# Altium PCB PCB_MAX_QUANG.pcbdoc
Units mil, origin at the board's own origin, x right, y up, seen from the top; angles counter-clockwise.
Board outline 1387.98 x 2391.13 mil, 2 copper layers (Top Layer, Bottom Layer); 20 components, 20 nets, 79 pads, 15 vias.
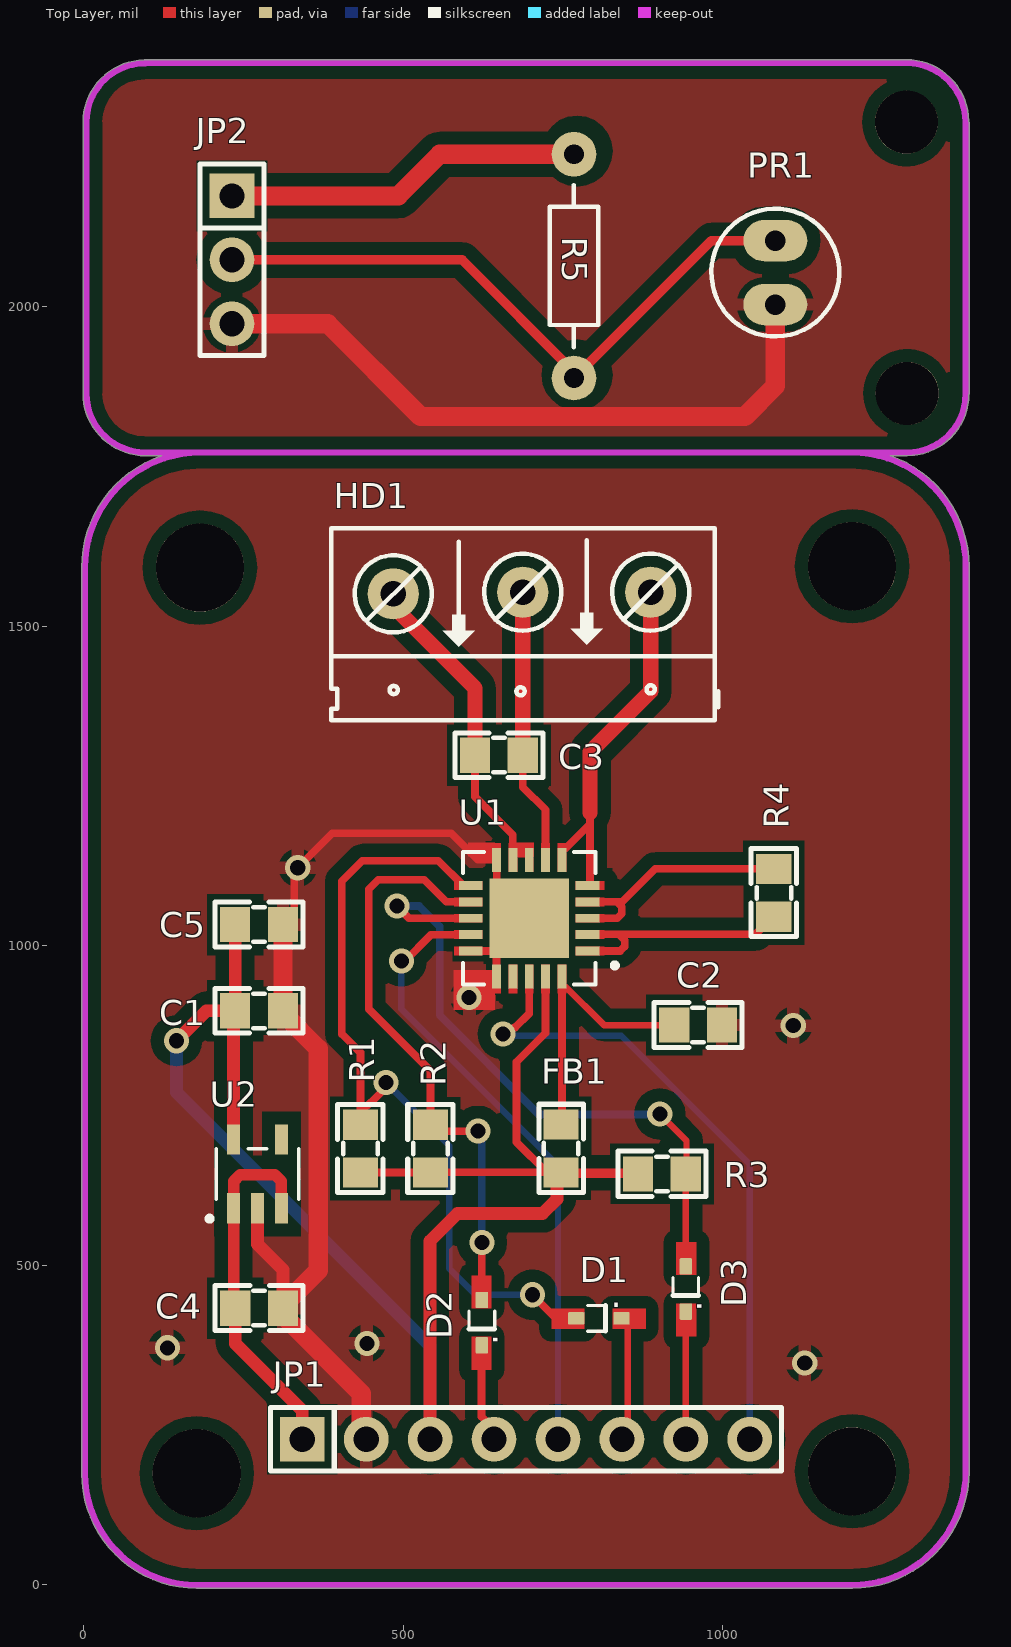
[diagram p0: Top Layer view]
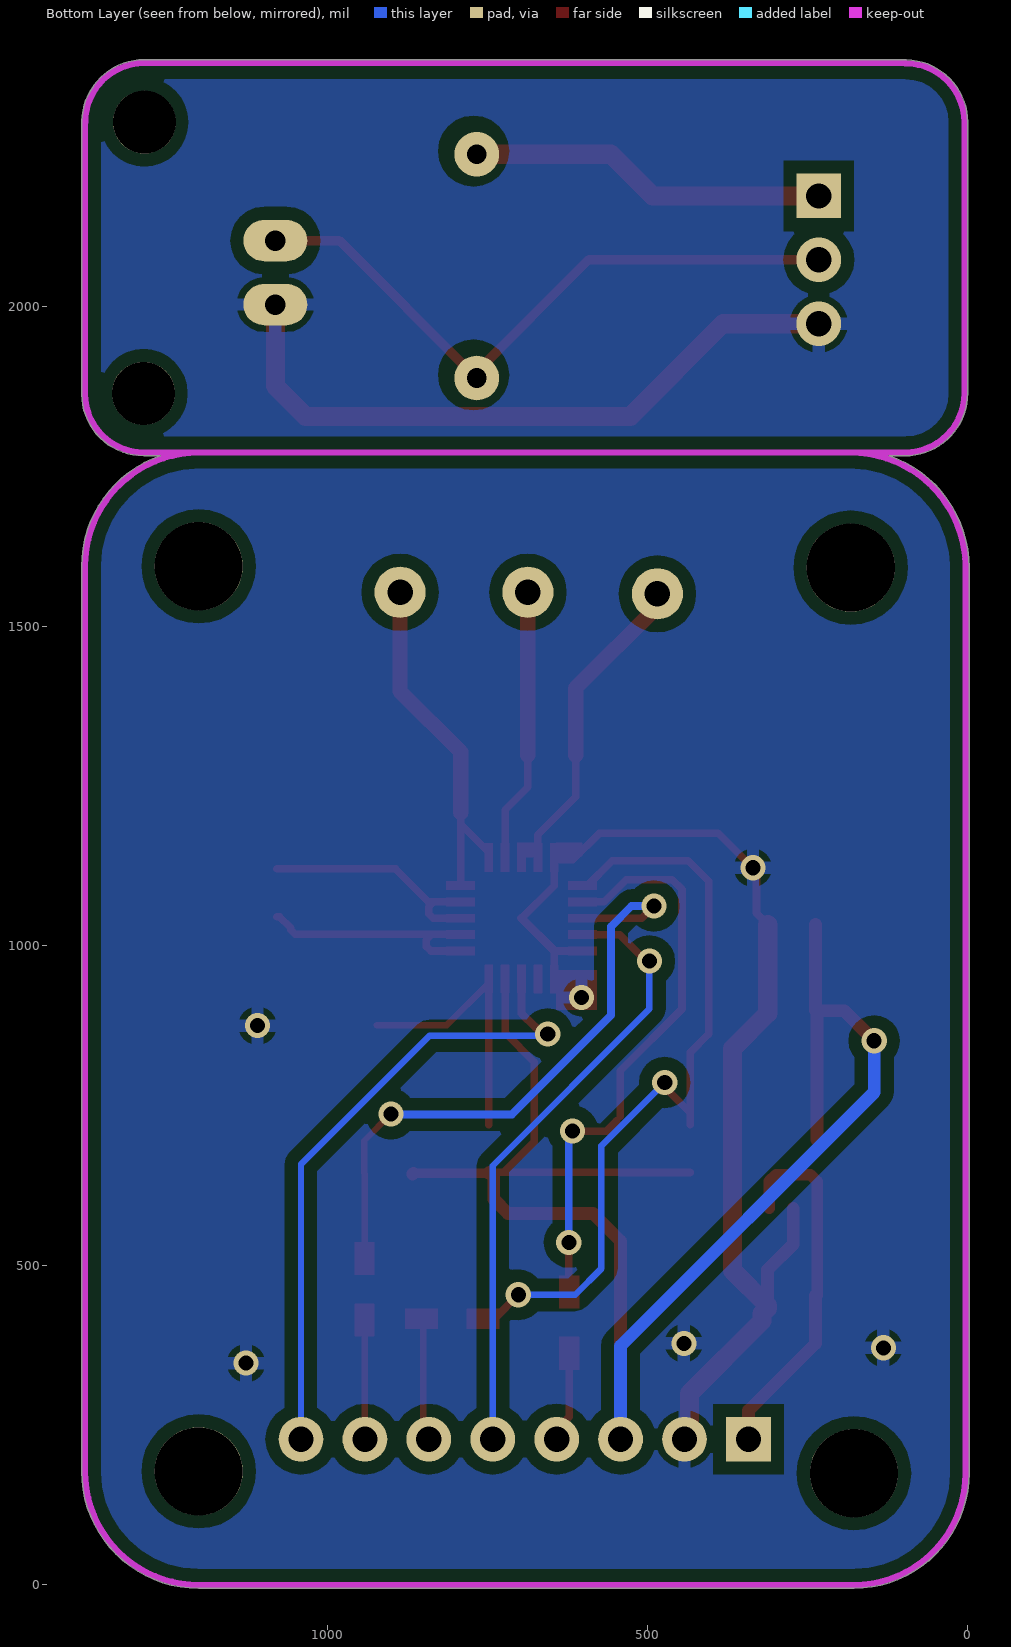
[diagram p1: Bottom Layer view, seen from below]
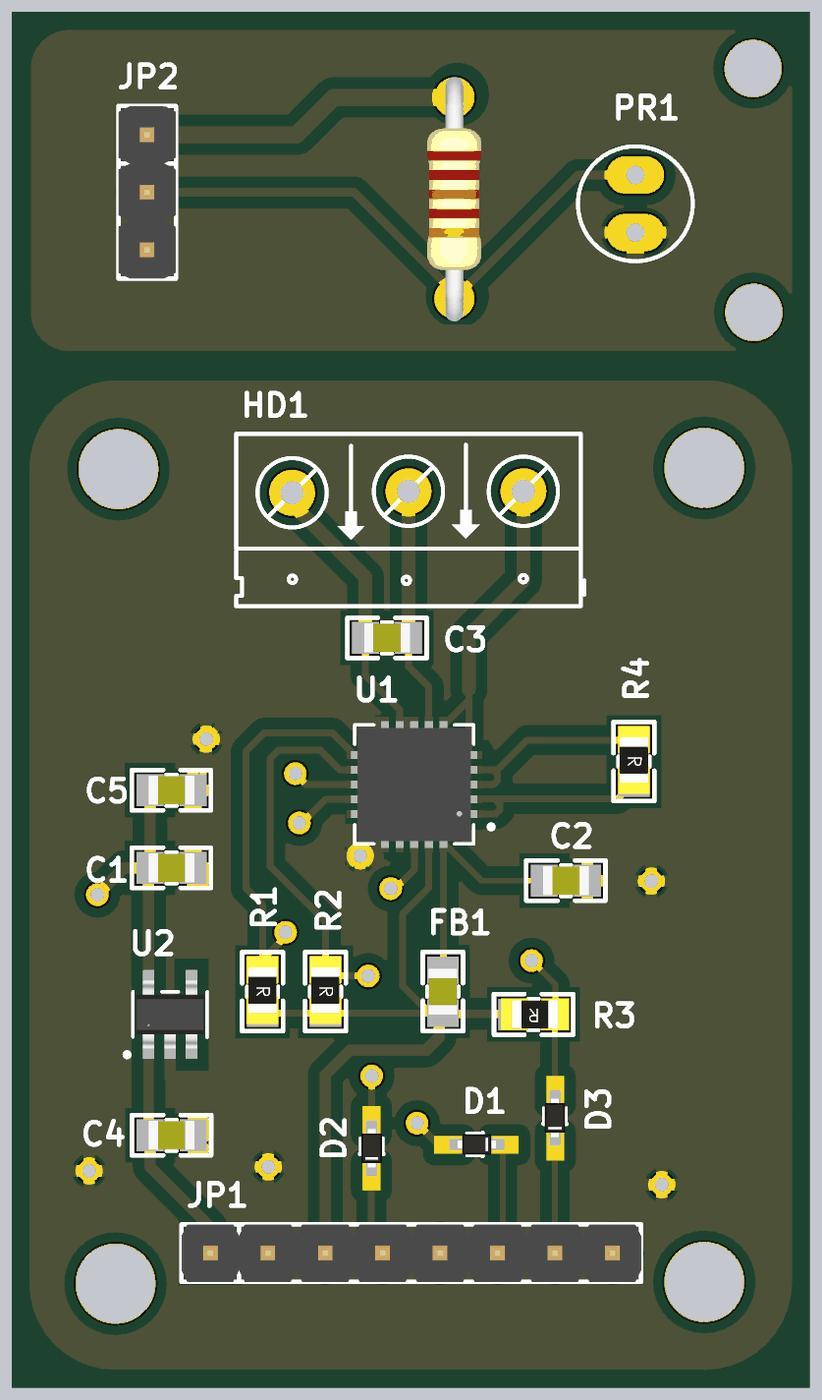
[diagram p2: 3D render of the assembled board from above, using the file's embedded part models]

## Layer stack, top to bottom
Top Solder: solder mask 0.4, Solder Resist, Dk 3.5
Top Layer: signal copper 1.4
Dielectric 1: dielectric 12.6, FR-4, Dk 4.8
Bottom Layer: signal copper 1.4
Bottom Solder: solder mask 0.4, Solder Resist, Dk 3.5

## Board outline
-3.02,174.85 -3.02,178 -3.02,1591.5 cw(c2,1591.5) -3.02,1591.57 cw(c182,1591.5) 121.91,1766.49 96.7,1766.49 cw(c96.7,1864.16) -0.97,1864.16 -0.97,2288 cw(c96.7,2288) 95.13,2385.66 cw(c96.87,2380.95) 96.87,2385.97 1287,2385.97 cw(c1287,2288.3) 1384.65,2290.05 cw(c1379.95,2288.3) 1384.97,2288.3 1384.97,1863.35 cw(c1379.95,1863.35) 1384.93,1862.76 cw(c1288.07,1863.35) 1288.07,1766.49 1261.75,1766.49 cw(c1202,1593.55) 1384.97,1593.55 cw(c1379.95,1593.55) 1384.97,1593.47 1384.97,178 cw(c1379.95,178) 1384.97,177.9 cw(c1379.95,177.8) 1384.97,177.8 cw(c1202,177.8) 1202,-5.16 177,-5.16 cw(c177,174.85)

## Design rules (kind name [scope] priority, off if disabled: settings)
Clearance [All] p1: gap=10 ignorepadtopadclearanceinfootprint=FALSE except(20: THPad-Fill THPad-Poly THPad-Region Via-Fill Via-Poly Via-Region)
HoleSize [All] p1: absolutevalues=TRUE maxlimit=1000 minlimit=1 maxpercent=80.000 minpercent=20.000
PlaneConnect [All] p1: planeconnectstyle=Relief reliefexpansion=20 reliefentries=4 reliefconductorwidth=20 reliefairgap=20
PolygonConnect [All] p1: connectstyle=Relief reliefconductorwidth=20 reliefentries=4 polygonreliefangle="90 Angle" airgapwidth=10
RoutingVias [All] p1: holewidth=23.62 width=39.37 viastyle="Through Hole" minholewidth=23.62 minwidth=39.37 maxholewidth=23.62 maxwidth=39.37
SilkToSilkClearance [All] p1: silktosilkclearance=0
SilkToSolderMaskClearance [IsPad] p1: minsilkscreentomaskgap=0 clearancetoexposedcopper=TRUE
SolderMaskExpansion [All] p1: expansion=4
Width [All] p1: maxlimit=30 minlimit=10 preferedwidth=20
26 further rules are at their usual default settings.

## Components (designator, comment, footprint, x,y, rotation, side; value= is the part's Value field where it differs from the comment)
C1 "0.1uF" "tu 0805" 274.23,898.27 r0 top
C2 "0.1uF" "tu 0805" 961,876 r0 top
C3 "100nF" "tu 0805" 649.77,1297.87 r180 top
C4 "10uF" "tu 0805" 274.43,433.13 r0 top
C5 "10uF" "tu 0805" 274.23,1033.13 r0 top
D1 "1N4148" SOD523F 806,417 r180 top value=1N4007
D2 "1N4148" SOD523F 623,410.43 r90 top value=1N4007
D3 "1N4148" SOD523F 942,463 r90 top value=1N4007
FB1 "FERRITE-0805NO" "tu 0805" 747,683 r270 top
HD1 "Header 3" HED3 887,1553 r180 top
JP1 "CONNECT" "JP 1x8 DT" 342,228 r0 top
JP2 "PHOTORESISTOR" "JP 1x3 DT" 232,2173 r270 top
PR1 "Photoresistor" CDS 1082,2003 r90 top
R1 "10k" "tro smd 0805" 435.39,682.77 r270 top
R2 "10k" "tro smd 0805" 545,682.77 r270 top
R3 "10k" "tro smd 0805" 904.77,640.61 r180 top
R4 "430" "tro smd 0805" 1082,1083 r270 top
R5 "10k" R1/4W 767,1888 r90 top
U1 "MAX31865ATP+" 21-0140_T2055+5_MXM 697,1043 r180 top
U2 "MIC5225-3.3YM5-TR" SOT-23-5_M5_MCH 272,643 r90 top

## Footprints (in the part's own frame and the unit in brackets; to place one, negate y for a bottom-side part, rotate by r counter-clockwise, add the part's x,y. Pads: shape width x height; smd on the part's side, far side on the other; paste and mask are expansions set on the pad)
21-0140_T2055+5_MXM [mm]
  rect 0.95x0.35 smd paste+0 mask+0: 1(-2.322,1.3) 2(-2.322,0.65) 3(-2.322,0) 4(-2.322,-0.65) 5(-2.322,-1.3) 11(2.322,-1.3) 12(2.322,-0.65) 13(2.322,0) 14(2.322,0.65) 15(2.322,1.3)
  rect 0.35x0.95 smd paste+0 mask+0: 6(-1.3,-2.322) 7(-0.65,-2.322) 8(0,-2.322) 9(0.65,-2.322) 10(1.3,-2.322) 16(1.3,2.322) 17(0.65,2.322) 18(0,2.322) 19(-0.65,2.322) 20(-1.3,2.322)
  rect 3.15x3.15 smd paste-1.613 mask+0: 21(0,0)
  Top Layer region: 1.475,1.846 1.475,2.996 1.125,2.996 1.125,1.846
  Top Layer region: 0.825,1.847 0.825,2.997 0.475,2.997 0.475,1.847
  Top Layer region: 0.175,1.847 0.175,2.997 -0.175,2.997 -0.175,1.847
  Top Layer region: -1.125,1.847 -1.125,2.997 -1.475,2.997 -1.475,1.847
  Top Layer region: -0.475,1.847 -0.475,2.997 -0.825,2.997 -0.825,1.847
  Top Layer region: 2.997,1.475 1.847,1.475 1.847,1.125 2.997,1.125
  Top Layer region: 2.997,0.825 1.847,0.825 1.847,0.475 2.997,0.475
  Top Layer region: 2.997,0.175 1.847,0.175 1.847,-0.175 2.997,-0.175
  Top Layer region: 2.997,-1.125 1.847,-1.125 1.847,-1.475 2.997,-1.475
  Top Layer region: 2.997,-0.475 1.847,-0.475 1.847,-0.825 2.997,-0.825
  Top Layer region: 1.475,-2.997 1.475,-1.847 1.125,-1.847 1.125,-2.997
  Top Layer region: 0.825,-2.996 0.825,-1.846 0.475,-1.846 0.475,-2.996
  Top Layer region: 0.175,-2.996 0.175,-1.846 -0.175,-1.846 -0.175,-2.996
  Top Layer region: -1.125,-2.996 -1.125,-1.846 -1.475,-1.846 -1.475,-2.996
  Top Layer region: -0.475,-2.996 -0.475,-1.846 -0.825,-1.846 -0.825,-2.996
  Top Layer region: -2.997,-1.475 -1.847,-1.475 -1.847,-1.125 -2.997,-1.125
  Top Layer region: -2.997,-0.825 -1.847,-0.825 -1.847,-0.475 -2.997,-0.475
  Top Layer region: -2.997,-0.175 -1.847,-0.175 -1.847,0.175 -2.997,0.175
  Top Layer region: -2.997,1.125 -1.847,1.125 -1.847,1.475 -2.997,1.475
  Top Layer region: -2.997,0.475 -1.847,0.475 -1.847,0.825 -2.997,0.825
  silkscreen extent -3.5,-2.63 2.63,2.63, body extent -2.5,-2.5 2.5,2.5, height 0.81
CDS [mil] "QUANG TRO"
  oval 65x100 hole 32: 1(0,0) 2(100,0)
  silkscreen extent -50,-100 150,100
HED3 [mil] "Header 3, 3 pin, hight 300mil, Pin to Pin 200, Colour Green"
  round 80 hole 40: 1(0,0) 2(200,0) 3(402.62,2.62)
  silkscreen extent -106,-100 500,200
"JP 1x3 DT" [mil]
  rect 70x70 hole 39.37: 1(0,0)
  round 70 hole 39.37: 2(100,0) 3(200,0)
  silkscreen extent -50,-50 250,50, body extent -50,-50 250,50, height 336
"JP 1x8 DT" [mil] "8 pins, 1 row, straight, gold plating"
  rect 70x70 hole 39.37: 1(0,0)
  round 70 hole 39.37: 2(100,0) 3(200,0) 4(300,0) 5(400,0) 6(500,0) 7(600,0) 8(700,0)
  silkscreen extent -50,-50 750,50, body extent -50,-50 750,50, height 336
R1/4W [mil] "R 1/4W, 2 Pin, 350mil"
  round 70 hole 31: 1(0,0) 2(350,0)
  silkscreen extent 48,-38 302,38, body extent -40,-47 386,47, height 111
SOD523F [mm] "SOD-523F; 2 Leads; Body 1.3 x 0.9 mm, (LxW)"
  round 0.508 on Mech15: 0(0,0)
  rrect20% 0.65x0.5 smd: A(0.9,0) K(-0.9,0)
  Top Layer pour cut-out: -0.725,-0.25 -0.725,0.25 -0.525,0.45 0.525,0.45 0.725,0.25 0.725,-0.25 0.525,-0.45 -0.525,-0.45
  silkscreen extent -0.25,-0.51 0.45,0.51, body extent -0.85,-0.45 0.85,0.45, height 0.7
SOT-23-5_M5_MCH [mm]
  rect 1.2x0.508 smd paste+0 mask+0: 1(-1.362,0.95) 2(-1.362,0) 3(-1.362,-0.95) 4(1.362,-0.95) 5(1.362,0.95)
  silkscreen extent -1.88,-1.64 1,2, body extent -1.5,-1.51 1.5,1.51, height 1.3
"tro smd 0805" [mm]
  rect 1.2x1.4 smd: 1(-0.946,-0.061) 2(0.954,-0.061)
  silkscreen extent -1.75,-0.97 1.75,0.84, body extent -1.56,-0.76 1.44,0.64, height 0.53
"tu 0805" [mm] "Compoment SMD 80x50mil"
  rect 1.2x1.4 smd: 1(-0.946,-0.003) 2(0.954,-0.003)
  silkscreen extent -1.75,-0.89 1.75,0.89, body extent -1.01,-0.64 1.01,0.63, height 0.61

## Part data
C1 C2 C3 C4 C5: library part "Tu 0805 101 50V 20%", "Dán", Chung_Loai=Dán, Don_Vi=Con, Ma_Hang=MH002806, So_Chan=2, Ten_Linh_Kien="T? 0805 101-0.1nF 50V 20%"
D1 D2 D3: library part "Diode  1N4007", "Diode 1A"
FB1: "Ferrite Bead   0603 MMZ1608B121C - 120 Ohm @ 100MHz, 600mA, 0.15 Ohm DC Resistance - Digikey: 445-2164-1-ND  BK1608HW121-T - 120 Ohm, 600mA Ferrite Chip - Digikey: 587-1876-2-ND       0805 HZ0805B272R-10 - 2.7K Ohm @ 100MHz, 200mA, 0.8 Ohm DC Resistance - Digikey: 240-2504-1-ND (see also Murata BLM21BD272SN1L)  MMZ2012Y152B - 1.5K Ohm @ 100MHz, 500mA, 0.4 Ohm DC Resistance - Digikey: 445-1560-1-ND - Mainly for high frequency (80-400MHz)  MMZ2012R102A - 1K Ohm @ 100MHz, 500mA, 0.3 Ohm DC Resistance - Digikey: 445-1555-2-ND - More general purpose (10-200MHz)", DeviceName=-0805NO, DeviceSetName=FERRITE, GateName_1=G$1, LibraryName=microbuilder, SymbolName_1=FERRITE
HD1: "Header 3 (Green)"
JP1: library part "JP 1x8 2.54 Duc Thang", "C?m", Chung_Loai=C?m, Don_Vi=Con, Ma_Hang=MH000903, Ten_Linh_Kien="Jump Ðon Ð?c 2.54MM 1x40P Th?ng 11MM"
JP2: library part "JP 1x3 2.54 Duc Thang", "C?m", Chung_Loai=C?m, Don_Vi=Con, Ma_Hang=MH000903, Ten_Linh_Kien="Jump Ðon Ð?c 2.54MM 1x40P Th?ng 11MM"
R1 R2 R3 R4: library part "Tro 0805 1% 18k", "Dán", Chung_Loai=Dán, Don_Vi=Con, Ma_Hang=MH005477, So_Chan=2, Ten_Linh_Kien="Tr? 0805 1% 18k"
R5: library part Res, "Res"
U2: "No Description Available", Mfr_Name=Microchip, RefDes=RefDes, Type=Type
PR1: Creator="Bien Nguyen"

## Free pads (board coordinates)
  round 137.8 hole 137.8: ""(177,174.85) ""(182,1591.5) ""(1202,177.8) ""(1202,1593.55)
  round 98.43 hole 98.43: ""(1287,2288.3) ""(1288.3,1864)

## Via types
v1: diameter 39.37, hole 23.62, Top Layer to Bottom Layer, 15 vias

## Nets (pads, with @x,y where several pads share a name; then routed paths per layer and width w, separated by ;. In a path a pad name is that pad's centre, name@x,y a point inside that pad or via, vN(x,y) a via of type N, cw(c..) or ccw(c..) an arc to the next point about the centre after c; other vN are vias at no path point)
CS: D3.K JP1.7 | length 182.9
  Top Layer w10: JP1.7 942,410.93
DRDY: JP1.8 U1.18 | length 983.8
  Top Layer w12: v1(656,862) 663.41,862 673.55,872.15 675.15,872.15 697,894 U1.18@697,936.59
  Bottom Layer w10: v1@668.31,859 841,859 1042,658 JP1.8
GND: C1.2 C2.2 C4.2 C5.2 JP1.2 U1.10 U1.15 U1.16 U1.21 U2.2 | length 1844.4
  Top Layer w12: C5.2 329.43,1050.62 329.43,1109.02 335,1114.59 v1(335,1122) 389,1176 575,1176 616.6,1134.41 U1.10 646,1134.41 646,1094 U1.21 ; v1(603,919) 635.59,951.59 U1.16 645.82,991.82 U1.15
  Top Layer w14: U1.21@645.82,991.82 U1.21
  Top Layer w20: U2.2 272,533 312,493 C4.2@312,436.94
  Top Layer w30: C5.2 C1.2 311.8,894.2 367,839 367,491.94 312,436.94 C4.2 320.62,424.38 320.62,413.38 434.35,299.65 434.35,235.65 JP1.2
  other v1: 1128,347 131,371 443,378 1110,875
GND1: JP2.3 PR1.1 | length 1057.2
  Top Layer w30: JP2.3 382,1973 527,1828 1034.43,1828 1082,1875.57 PR1.1
NetC2_1: C2.1 FB1.1 U1.20 | length 435.2
  Top Layer w10: U1.20@748.18,941.59 748.18,939.78 750.07,937.89 751.88,937.89 813.91,875.87 C2.1
  Top Layer w12: FB1.1@748.18,720.23 748.18,941.59 U1.20
NetC3_1: C3.1 HD1.2 U1.7 | length 433.3
  Top Layer w12: C3.1 687,1248 722.59,1212.41 U1.7
  Top Layer w24: C3.1 HD1.2
NetC3_2: C3.2 HD1.3 U1.8 U1.9 | length 493.4
  Top Layer w12: C3.2 612.2,1232.8 671.41,1173.59 U1.9
  Top Layer w24: HD1.3 484.38,1530.62 612.2,1402.8 C3.2
NetD1_A: D1.A R1.1 U1.11 | length 1240.1
  Top Layer w12: R1.1 R1.1@433,738.43 ; v1(473,786) 468.52,781.52 468.52,773.95 R1.1@433,738.43 ; U1.11 593.78,1094.18 554.96,1133 436,1133 404,1101 404,862 433,833 R1.1@433,738.43 ; v1(702,454) 740,416 748,416 ; D1.A@763.77,423.8 763.77,420.84 767.61,417 D1.A
  Bottom Layer w10: v1(473,786) 572,687 572,495 613,454 v1(702,454)
NetD2_A: D2.A R2.1 U1.12 | length 920.4
  Top Layer w12: R2.1@542.61,733 542.61,804.39 446,901 446,1088 461,1103 533,1103 567.41,1068.59 U1.12 ; R2.1@548.47,725.86 548.47,725.69 564.17,710 v1(617,710) ; D2.A v1(623,536)
  Bottom Layer w12: v1(617,710) 623,710 v1(623,536)
NetD3_A: D3.A R3.1 U1.13 | length 1007.2
  Top Layer w10: v1(901.31,736.69) 943,695 943,644 R3.1 D3.A
  Top Layer w12: v1(490,1062) 509,1043 U1.13
  Bottom Layer w12: v1(490,1062) 525,1062 557,1030 557,891 712,736 v1@901.31,736
NetHD1_1: HD1.1 U1.5 U1.6 | length 575
  Top Layer w12: U1.6 748.18,1146.22 792,1190.04 ; U1.5 791.11,1094.18 792,1095.07 792,1190.04 ; 792,1208 792,1190.04
  Top Layer w24: 792,1208 792,1303 887,1398 HD1.1
NetR4_1: R4.1 U1.3 U1.4 | length 390.8
  Top Layer w12: U1.3 834.97,1043 842,1050.03 842,1060.97 837.49,1065.49 834.38,1068.59 ; U1.4 834.38,1068.59 ; R4.1 894.23,1120.23 842.59,1068.59 834.38,1068.59
NetR4_2: R4.2 U1.1 U1.2 | length 388.1
  Top Layer w12: U1.1 839.18,991.82 846.21,998.85 846.21,1008.79 842,1013 837,1018 ; U1.2 789,1018 837,1018 ; R4.2 1075.67,1045.43 1058.05,1027.8 1058.05,1025.03 1051.02,1018 837,1018
SCLK: D2.K JP1.4 | length 146.9
  Top Layer w12: D2.K@622.5,366.8 622.5,263.19 642,243.69 JP1.4
SDI: D1.K JP1.6 | length 198.4
  Top Layer w10: D1.K 844.39,417 849.23,412.16 849.23,408.07 851,406.3 851,237 JP1.6
SDO: JP1.5 U1.14 | length 975.2
  Top Layer w12: v1(497,976) 502,976 543.41,1017.41 U1.14
  Bottom Layer w10: v1(497,976) 497,901 742,656 JP1.5
SIG: JP2.2 PR1.2 R5.1 | length 1011.5
  Top Layer w15: JP2.2 592,2073 772,1893 982,2103 PR1.2
VCC: JP2.1 R5.2 | length 569
  Top Layer w30: JP2.1 492,2173 557,2238 R5.2
  Bottom Layer w30: R5.2 R5.2@772,2243
VDD: C1.1 C5.1 FB1.2 JP1.3 R1.2 R2.2 R3.2 U1.19 U2.5 | length 2589
  Top Layer w12: R1.2 R2.2 542.83,645.43 FB1.2@724.57,645.43 ; U1.19 722.59,863.59 677,818 677,693 FB1.2@724.57,645.43 ; FB1.2@739.6,645.43 FB1.2@724.57,645.43
  Top Layer w15: FB1.2@748.08,644.21 R3.2@865.98,644.21
  Top Layer w20: v1(145.31,851.31) 192.13,898.13 C1.1 ; U2.5 234.6,895.73 C1.1 ; C5.1 C1.1 ; JP1.3 542,538 585,581 718,581 740.52,603.52 740.52,639.08 FB1.2 FB1.2@748.08,644.21 ; R3.2@865.98,644.21 R3.2
  Bottom Layer w20: v1(145.31,851.31) 145.31,770.69 542,374 JP1.3
VIN: C4.1 JP1.1 U2.1 U2.3 | length 572.5
  Top Layer w18: C4.1@234.6,453 234.6,631.46 245.14,642 298.86,642 309.4,631.46 U2.3
  Top Layer w20: C4.1@237.2,453 C4.1 237.2,377.8 342,273 JP1.1
pads on no net: D1.0 D2.0 D3.0 U1.17 U2.4

## Polygon pours and split planes (outlines as drawn)
GND on Bottom Layer "GND_L02_P002" (solid, pour order 2): 1202,1771.5 cw(c1202,1593.05) 1380.46,1593.05 1380.46,177.8 cw(c1202.51,177.8) 1202.5,-0.15 175.64,-0.15 cw(c175.64,172.98) 2.5,172.99 2.5,1590 cw(c184.01,1590) 184.01,1771.5
GND1 on Bottom Layer "GND1_L02_P003" (solid, pour order 3): 96.87,2380.95 97.17,2381.25 1287.17,2381.25 cw(c1287.17,2288.6) 1379.82,2288.6 1379.82,1863.65 cw(c1288.27,1863.65) 1288.27,1771.8 96.87,1771.8 cw(c96.87,1864.46) 4.22,1864.46 4.22,2288.43 cw(c97.04,2288.43) 97.04,2381.25
GND on Top Layer "GND_L01_P001" (solid, pour order 1): 1201,1772 cw(c1201,1593.54) 1379.46,1593.54 1379.46,178.3 cw(c1201.51,178.3) 1201.5,0.35 174.64,0.35 cw(c174.64,173.48) 1.5,173.48 1.5,1590.5 cw(c183.01,1590.5) 183.01,1772
GND1 on Top Layer "GND1_L01_P000" (solid, pour order 0): 96.7,2380.65 97,2380.95 1287,2380.95 cw(c1287,2288.3) 1379.65,2288.3 1379.65,1863.35 cw(c1288.11,1863.35) 1288.11,1771.5 96.7,1771.5 cw(c96.7,1864.16) 4.05,1864.16 4.05,2288.13 cw(c96.87,2288.13) 96.87,2380.95

## Keep-outs
Keep-Out Layer:
  lines w10: 96.7,2380.65 ccw(c96.7,2288) 4.05,2288 4.05,1864.16 ccw(c96.7,1864.16) 96.7,1771.5 1202,1771.5 ; 96.87,2380.95 1287,2380.95 cw(c1287,2288.3) 1379.65,2288.3 ; 182,1771.5 ccw(c182,1591.5) 2,1591.5 2,178 2,174.85 ccw(c177,174.85) 177,-0.15 1202,-0.15 ccw(c1202,177.8) 1379.95,177.8 1379.95,178 1379.95,1593.55 ccw(c1202,1593.55) 1202,1771.5 ; 1379.92,1863.35 cw(c1288.07,1863.35) 1288.07,1771.5 1202,1771.5 ; 1379.95,1863.35 1379.95,2288.3

## Other copper
Top Layer:
  region net GND: 643,1160.82 601.67,1160.88 601.67,1140.12 643,1140.12
  region net GND: 643,900 579,900 579,962 643,962
  region net NetD2_A: 607,433 607,484 638,484 638,433
  region net SCLK: 638,388 638,337 607,337 607,388
  region net NetD1_A: 783,401 732,401 732,432 783,432
  region net SDI: 828,432 879,432 879,401 828,401
  region net NetD3_A: 927,485 927,536 958,536 958,485
  region net CS: 958,440 958,389 927,389 927,440
  region net NetC3_2: 703.88,1160.95 667,1160.95 667,1138 703.88,1138

## Silkscreen, mask and mechanical layers (free items; w line width, h text height)
Top Solder:
  region: 607,433 607,484 638,484 638,433
  region: 638,388 638,337 607,337 607,388
  region: 783,401 732,401 732,432 783,432
  region: 828,432 879,432 879,401 828,401
  region: 927,485 927,536 958,536 958,485
  region: 958,440 958,389 927,389 927,440